# EAGLE board mainboard (EAGLE 7.2.0)
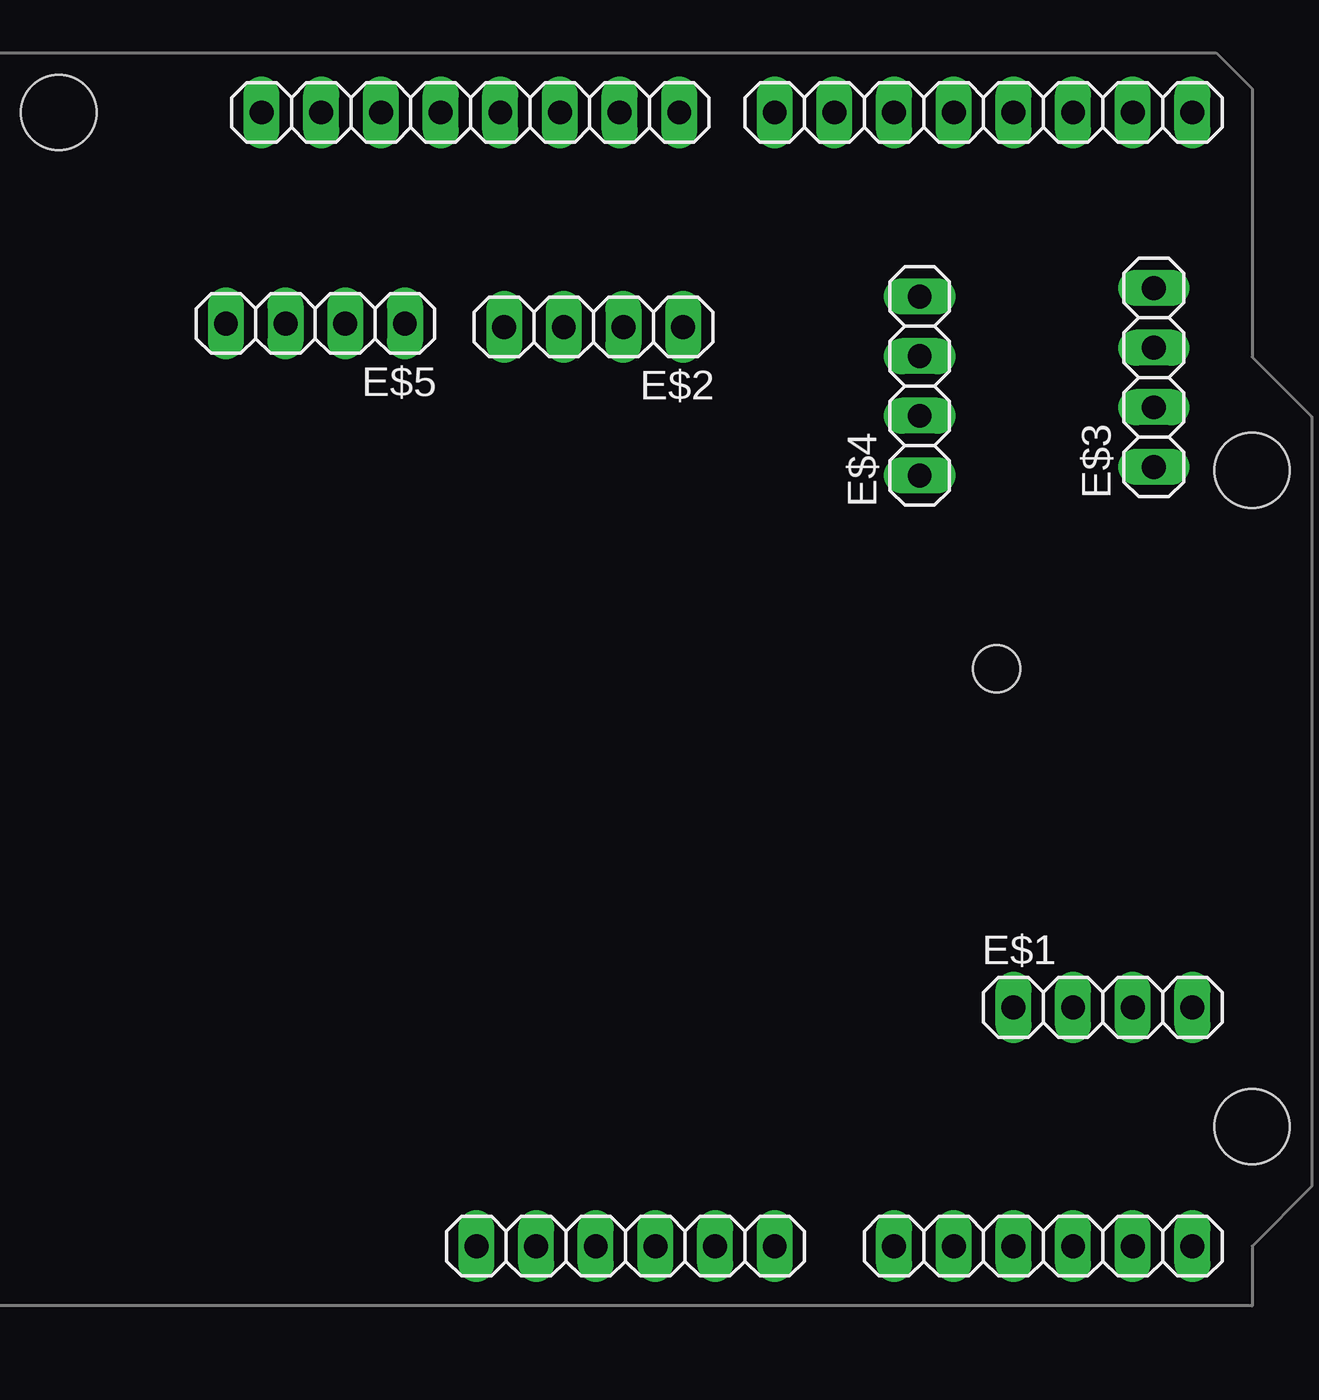
[diagram p0: board, top side]
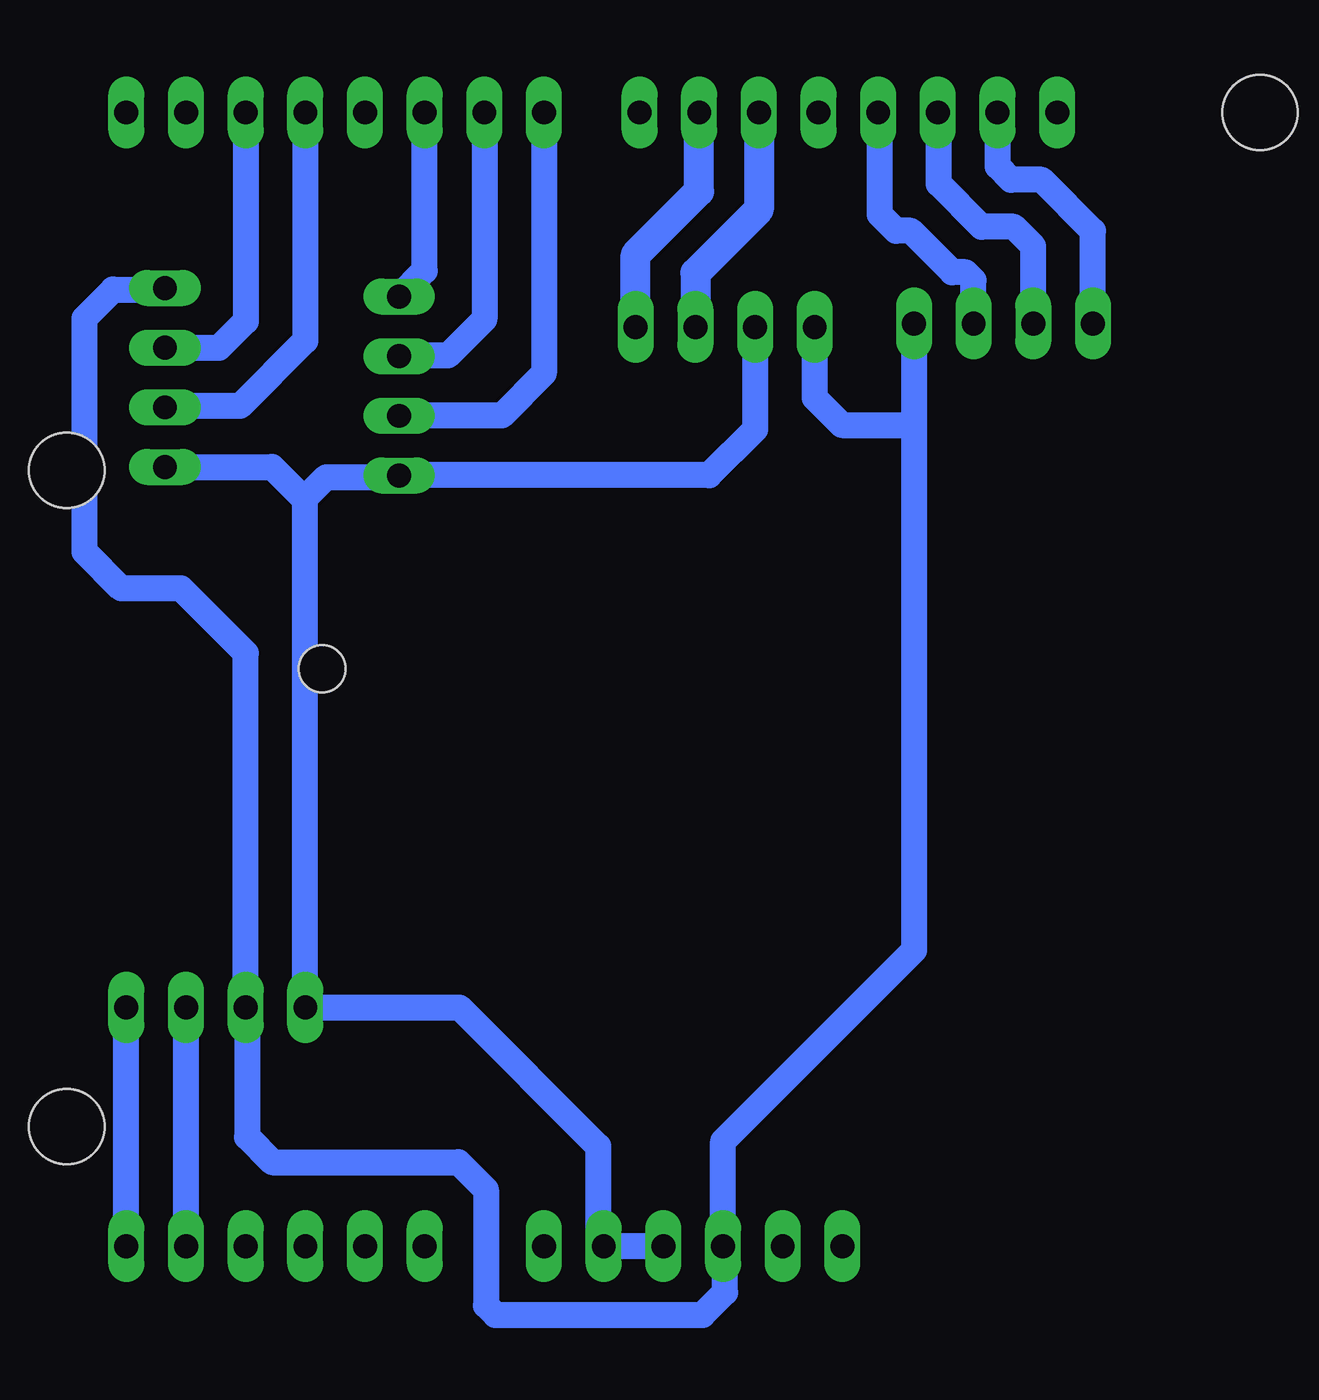
[diagram p1: board, bottom side, seen from below]

No outline drawn. Coordinates in mm, seen from the top.
Copper layers (1*16): Top 0.035mm / dielectric 1.5mm / Bottom 0.035mm
Design rules "default": minimum track width 10mil, minimum drill 24mil, track to track 8mil, track to pad 8mil, pad to pad 8mil, via to via 8mil, smd to smd 8mil, copper to edge 40mil, drill to drill 8mil, minimum pad ring 10mil, minimum via ring 8mil, stop-mask expansion 4mil, vias tented up to drill 0mil, thermal gap 10mil

## Footprints (pad centres in the part's own frame; a part is rotated, then mirrored left to right if it is on the bottom)
1X04 = drill 1.016 long: 1 -3.81,0; 2 -1.27,0; 3 1.27,0; 4 3.81,0
ARDUINO2009 = drill 1.016 long: 1 33.02,2.54; 2 35.56,2.54; 3 38.1,2.54; 4 40.64,2.54; 5 43.18,2.54; 6 45.72,2.54; 7 50.8,2.54; 8 53.34,2.54; 9 55.88,2.54; 10 58.42,2.54; 11 60.96,2.54; 12 63.5,2.54; 13 63.5,50.8; 14 60.96,50.8; 15 58.42,50.8; 16 55.88,50.8; 17 53.34,50.8; 18 50.8,50.8; 19 48.26,50.8; 20 45.72,50.8; 21 41.656,50.8; 22 39.116,50.8; 23 36.576,50.8; 24 34.036,50.8; 25 31.496,50.8; 26 28.956,50.8; 27 26.416,50.8; 28 23.876,50.8 | hole 3.2: 15.24,50.8; 66.04,35.56; 66.04,7.62 | hole 2: 55.17,27.114

## Placement (x,y rotation side)
E$1  [1X04]  48.26,-54.61 0 top
E$2  [1X04]  26.58,-25.64 180 top
E$3  [1X04]  50.43,-27.79 90 top
E$4  [1X04]  40.46,-28.15 90 top
E$5  [1X04]  14.73,-25.5 180 top
IC1  [ARDUINO2009]  -11.43,-67.31 0 top

## Library data of the parts
E$1-E$5 = pinhead
IC1 = arduino

## Nets
+3V3: IC1.2
+5V: E$1.2 E$2.4 E$3.4 E$5.1 IC1.3
GND: E$1.1 E$2.3 E$3.1 E$4.1 IC1.4 IC1.5
S$1: E$3.3 IC1.15
S$2: E$3.2 IC1.16
S$3: E$4.4 IC1.18
S$4: E$4.3 IC1.19
S$5: E$4.2 IC1.20
S$8: E$5.3 IC1.26
S$9: E$5.2 IC1.25
S$10: E$5.4 IC1.27
S$11: E$2.1 IC1.22
S$12: E$2.2 IC1.23
S$13: E$1.4 IC1.12
S$14: E$1.3 IC1.11

## Tracks (layer width: path | path; a pad name or v marks a point on that pad's centre or on a via)
+5V
  Bottom 1.1: E$3.4 50.5,-24.05 52.63,-24.05 53.85,-25.27 53.85,-35.21 52.29,-36.77 49.74,-36.77 46.99,-39.52 E$1.2 46.94,-54.66 46.94,-60.12 45.86,-61.2 37.93,-61.2 36.77,-62.36 36.77,-67.29 36.36,-67.7 27.54,-67.7 26.58,-66.74 26.58,-64.86 IC1.3 26.67,-60.3 18.55,-52.18 18.55,-29.82 | E$5.1 18.55,-29.82 | E$2.4 22.77,-28.66 21.61,-29.82 18.55,-29.82
GND
  Bottom 1.1: 44.45,-33.02 E$1.1 37.89,-54.61 31.98,-60.52 31.98,-64.54 IC1.5 IC1.4 | 44.45,-33.02 44.45,-32.92 43.57,-32.04 40.53,-32.04 E$4.1 40.45,-31.95 27.26,-31.95 25.31,-30 E$2.3 | E$3.1 45.87,-31.6 44.45,-33.02
S$1
  Bottom 1.1: IC1.15 46.99,-25.4 48.14,-26.54 50.41,-26.54 E$3.3
S$2
  Bottom 1.1: IC1.16 44.45,-26.23 47.23,-29.01 50.38,-29.01 E$3.2
S$3
  Bottom 1.1: E$4.4 39.37,-23.25 IC1.18
S$4
  Bottom 1.1: IC1.19 36.83,-25.31 38.38,-26.86 40.44,-26.86 E$4.3
S$5
  Bottom 1.1: IC1.20 34.29,-27.61 36.08,-29.41 40.44,-29.41 E$4.2
S$8
  Bottom 1.1: E$5.3 13.46,-22.21 14.3,-21.37 15.66,-21.37 17.49,-19.55 17.49,-16.55 IC1.26
S$9
  Bottom 1.1: E$5.2 16,-23.65 16.35,-23.31 16.92,-23.31 18.68,-21.54 19.31,-21.54 19.99,-20.86 19.99,-16.58 IC1.25
S$10
  Bottom 1.1: E$5.4 10.93,-21.55 13.1,-19.38 14.41,-19.38 14.98,-18.81 IC1.27
S$11
  Bottom 1.27: E$2.1 30.39,-22.57 27.69,-19.87 IC1.22
S$12
  Bottom 1.27: IC1.23 25.15,-20.64 27.85,-23.35 E$2.2
S$13
  Bottom 1.1: IC1.12 E$1.4
S$14
  Bottom 1.1: IC1.11 E$1.3